# EAGLE board testerProgrammer (EAGLE 4.16)
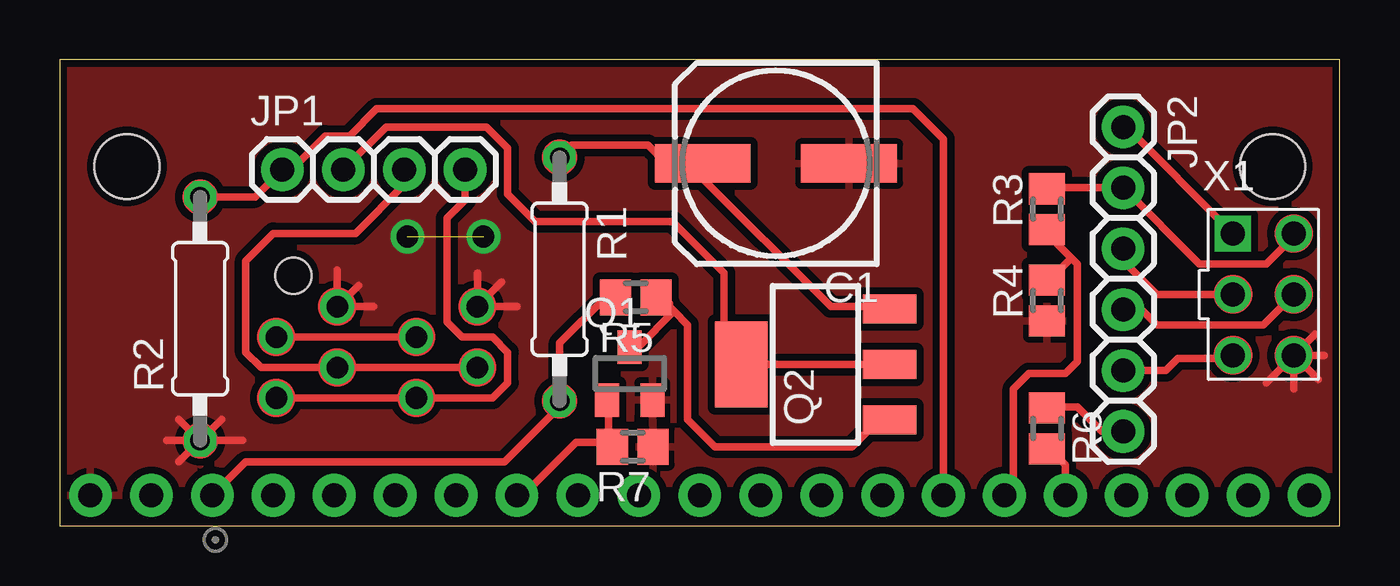
[diagram p0: board, top side]
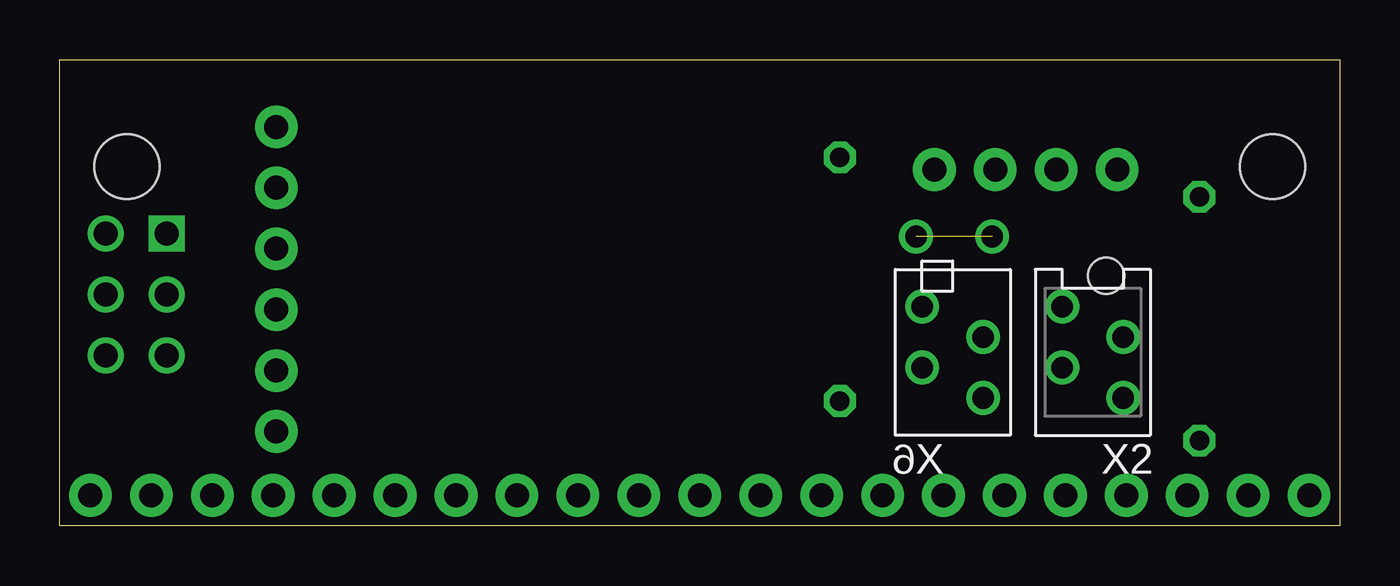
[diagram p1: board, bottom side, seen from below]

Size 53.34 x 19.43 mm. Coordinates in mm from the lower left corner, seen from the top.
Outline: 0,0 53.34,0 53.34,19.43 0,19.43 0,0
Copper layers (1*16): Top 0.035mm / dielectric 1.5mm / Bottom 0.035mm
Design rules "default": minimum track width 10mil, minimum drill 0.6mm, track to track 10mil, track to pad 10mil, pad to pad 10mil, via to via 10mil, smd to smd 8mil, copper to edge 10mil, drill to drill 8mil, minimum pad ring 10mil, minimum via ring 10mil, stop-mask expansion 4mil, vias tented up to drill 0mil, thermal gap 10mil
Holes 2.7 mm at 50.55,14.99 2.79,14.99

## Footprints (pad centres in the part's own frame; a part is rotated, then mirrored left to right if it is on the bottom)
153CLV-0807 = smd 4 x 1.6: + 3.05,0; - -3.05,0
1X04 = drill 1 pad 1.778 round: 1 -3.81,0; 2 -1.27,0; 3 1.27,0; 4 3.81,0
1X06 = drill 1 pad 1.778 round: 1 -6.35,0; 2 -3.81,0; 3 -1.27,0; 4 1.27,0; 5 3.81,0; 6 6.35,0
SOT23 = smd 1 x 1.4: 1 -0.95,-1.1; 2 0.95,-1.1; 3 0,1.1
SOT223 = smd 1.219 x 2.235: 1 -2.311,-3.099; 2 0,-3.099; 3 2.311,-3.099 | smd 3.6 x 2.2: 4 0,3.099
0207/10 = drill 0.813 octagon: 1 -5.08,0; 2 5.08,0
R0805 = smd 1.3 x 1.5: 1 -0.85,0; 2 0.85,0
6PINHEADER = drill 1 square: 1 -1.27,2.54 | drill 1 round: 2 1.27,2.54; 3 -1.27,0; 4 1.27,0; 5 -1.27,-2.54; 6 1.27,-2.54
MICROMATCH-4 = drill 0.9 round: 1 1.905,1.27; 2 0.635,-1.27; 3 -0.635,1.27; 4 -1.905,-1.27 | hole 1.5: 3.199,-0.562
CORE_IOHEAD_NOSILC = drill 1 pad 1.778 round: 1 25.4,0; 2 22.86,0; 3 20.32,0; 4 17.78,0; 5 15.24,0; 6 12.7,0; 7 10.16,0; 8 7.62,0; 9 5.08,0; 10 2.54,0; 11 0,0; 12 -2.54,0; 13 -5.08,0; 14 -7.62,0; 15 -10.16,0; 16 -12.7,0; 17 -15.24,0; 18 -17.78,0; 19 -20.32,0; 20 -22.86,0; 21 -25.4,0
MICROMATCH-4-MALE = drill 0.9 round: 1 5.715,1.27; 2 4.445,3.81; 3 3.175,1.27; 4 1.905,3.81

## Placement (x,y rotation side)
C1  100u  [153CLV-0807]  29.84,15.11 180 top
JP1  [1X04]  13.08,14.86 0 top
JP2  [1X06]  44.32,10.29 270 top
Q1  NMOS  [SOT23]  23.75,6.35 0 top
Q2  PMOS-4  [SOT223]  31.5,6.73 90 top
R1  10  [0207/10]  20.83,10.29 270 top
R2  5  [0207/10]  5.84,8.64 90 top
R3  47k  [R0805]  41.15,13.21 90 top
R4  12k  [R0805]  41.15,9.4 90 top
R5  10k  [R0805]  24,9.53 180 top
R6  10k  [R0805]  41.15,4.06 270 top
R7  10k  [R0805]  23.88,3.3 180 top
X1  AVRISP6PINHEADER  [6PINHEADER]  50.16,9.65 0 top
X2  MICROMATCH-4  [MICROMATCH-4]  10.29,7.24 90 bottom
X3  CORE_IOHEADEXP  [CORE_IOHEAD_NOSILC]  26.67,1.27 0 bottom
X6  [MICROMATCH-4-MALE]  18.67,3.43 90 top

## Library data of the parts
C1 R1-R7 = rcl
JP1 JP2 = pinhead-mm
Q1 Q2 = transistor
X1 = avrisp
X2 X6 = con-amp-micromatch
X3 = expboard

## Nets
CANH: JP1.4 X2.4 X6.4
CANL: JP1.3 X2.3 X6.3
DUT_GND: JP1.1 R2.2 X3.15
DUT_GND_TST: JP2.6 R6.1
DUT_MISO: JP2.1 X1.1
DUT_MOSI: JP2.4 X1.4
DUT_RST: JP2.5 X1.5
DUT_SCK: JP2.3 X1.3
DUT_SUPPLY: JP1.2 Q2.2 Q2.4
DUT_VTG: JP2.2 R3.2 X1.2
EXP_A: X3.4
EXP_B: X3.5
EXP_C: X3.6
EXP_D: X3.7
EXP_E: Q1.1 R7.2 X3.8
EXP_F: X3.9
EXP_G: X3.10
EXP_H: X3.11
EXP_I: X3.12
EXP_J: X3.13
EXP_K: X3.14
EXP_M: R3.1 R4.2 X3.16
EXP_N: R6.2 X3.17
EXP_O: X3.18
EXP_P: X3.19
EXP_Q: X3.20
EXP_R: X3.21
GND: C1.- Q1.2 R2.1 R4.1 R7.1 X1.6 X2.1 X3.1 X6.1
N$1: Q1.3 Q2.1 R5.1
N$8: C1.+ Q2.3 R1.1
V_CAN: R1.2 R5.2 X3.3
V_CAN_EXT: X2.2 X6.2
VCC: X3.2

## Tracks (layer width: path | path; a pad name or v marks a point on that pad's centre or on a via)
CANH
  Top 0.305: 8.89,5.21 X2.4 X6.4 18.03,5.33 18.67,5.97 18.67,7.24 18.03,7.87 16.76,7.87 16.13,8.51 16.13,12.83 16.89,13.59 JP1.4
CANL
  Top 0.305: X6.3 X2.3 8.38,6.6 7.75,7.24 7.75,11.05 8.89,12.19 12.32,12.19 14.35,14.22 JP1.3
DUT_GND
  Top 0.305: R2.2 8.13,13.72 JP1.1 9.65,14.86 11.05,16.26 12.06,16.26 13.21,17.4 35.56,17.4 36.83,16.13 X3.15
DUT_GND_TST
  Top 0.305: JP2.6 43.43,3.94 42.42,4.95 41.15,4.95 R6.1
DUT_MISO
  Top 0.305: 49.02,12.06 X1.1 44.32,16.76 JP2.1
DUT_MOSI
  Top 0.305: JP2.4 45.09,9.02 45.72,8.38 50.16,8.38 X1.4
DUT_RST
  Top 0.305: JP2.5 46.1,6.48 46.61,6.99 48.9,6.99 X1.5
DUT_SCK
  Top 0.305: 44.32,11.68 JP2.3 44.32,11.05 45.72,9.65 X1.3
DUT_SUPPLY
  Top 0.305: Q2.2 Q2.4 27.69,7.75 27.69,10.54 25.53,12.7 19.81,12.7 18.67,13.84 18.67,15.75 17.78,16.64 13.59,16.64 JP1.2
DUT_VTG
  Top 0.305: X1.2 51.44,12.06 50.29,10.92 47.5,10.92 JP2.2 41.27,14.1 41.15,13.97 R3.2
EXP_E
  Top 0.305: X3.8 19.3,1.27 21.51,3.47 22.82,3.47 22.99,3.3 | Q1.1 22.8,4.89 22.86,4.83 22.86,3.43 22.99,3.3 | 22.99,3.3 R7.2
EXP_M
  Top 0.305: X3.16 39.37,1.52 39.75,1.91 39.75,5.71 40.39,6.35 41.91,6.35 42.42,6.86 42.42,10.92 42.16,11.18 | R4.2 41.15,10.16 42.16,11.18 | R3.1 41.15,12.19 42.16,11.18
EXP_N
  Top 0.305: R6.2 41.15,3.3 41.91,2.54 X3.17
GND  (via drill 0.9)  (1 unrouted)
  Top 0.305: X2.1 11.56,10.67 | X2.1 13.08,9.14 | X2.1 12.45,10.03 | X6.1 19.05,9.14 | X6.1 18.41,10.16 | X6.1 17.4,10.54 | 50.29,5.97 X1.6 | X1.6 51.44,5.71 | X1.6 52.45,6.1 | X1.6 52.7,7.11 | X1.6 52.32,8 | R2.1 4.45,3.56 | R2.1 7.62,3.56 | R2.1 5.84,4.95 | R2.1 4.95,4.45 | R2.1 6.73,4.45 | 4.95,2.67 R2.1
  other vias: 14.48,12.06 17.65,12.06
  pour Top (isolate 0.305, rank 3): 0,19.43 53.34,19.56 53.34,1.14 0,1.14
N$1
  Top 0.305: 33.66,4.19 33.66,4.06 34.14,4.04 Q2.1 33.71,3.99 33.02,3.3 27.3,3.3 26.16,4.45 26.16,8.38 25.59,8.95 | 25.59,8.95 25.4,9.14 25.4,9.27 25.23,9.44 R5.1 | Q1.3 24.09,7.45 25.59,8.95
N$2  (via drill 0.6)
  other vias: 2.79,14.99
N$3  (via drill 0.6)
  other vias: 50.55,14.99
N$8
  Top 0.305: R1.1 21.34,15.88 24.51,15.88 25.27,15.11 | 34.7,9.04 34.29,8.76 | 34.7,9.04 Q2.3 | 34.7,9.04 33.91,9.14 32.13,9.14 26.54,14.73 25.53,14.73 25.15,15.11 25.27,15.11 | 25.27,15.11 C1.+
V_CAN
  Top 0.305: X3.3 7.75,2.67 18.54,2.67 20.83,4.95 20.83,6.48 | 20.83,6.48 R1.2 | 20.83,6.48 20.83,7.62 22.73,9.53 R5.2
V_CAN_EXT
  Top 0.305: X2.2 9.02,7.75 9.14,7.87 X6.2
(copper drawn outside any net)
  shapes: Top circle x17

## Text on the board
Document: Top is component side | Expansion will be mounted bottom to bottom with CoreCard | Change vertical dimension to fit | Remove I/O-header silcscreen if neccesary | Remove mounting holes if neccesary
tDocu: - | + | A | B | C | D | E | F | G | H | I | J | K | L | M | N | O | P | Q | R